# Altium PCB PCB1.PcbDoc
Units mm, origin at the board's own origin, x right, y up, seen from the top; angles counter-clockwise.
Board outline 58.8 x 38.5 mm, 2 copper layers (Top Layer, Bottom Layer); 14 components, 9 nets, 42 pads, 0 vias.
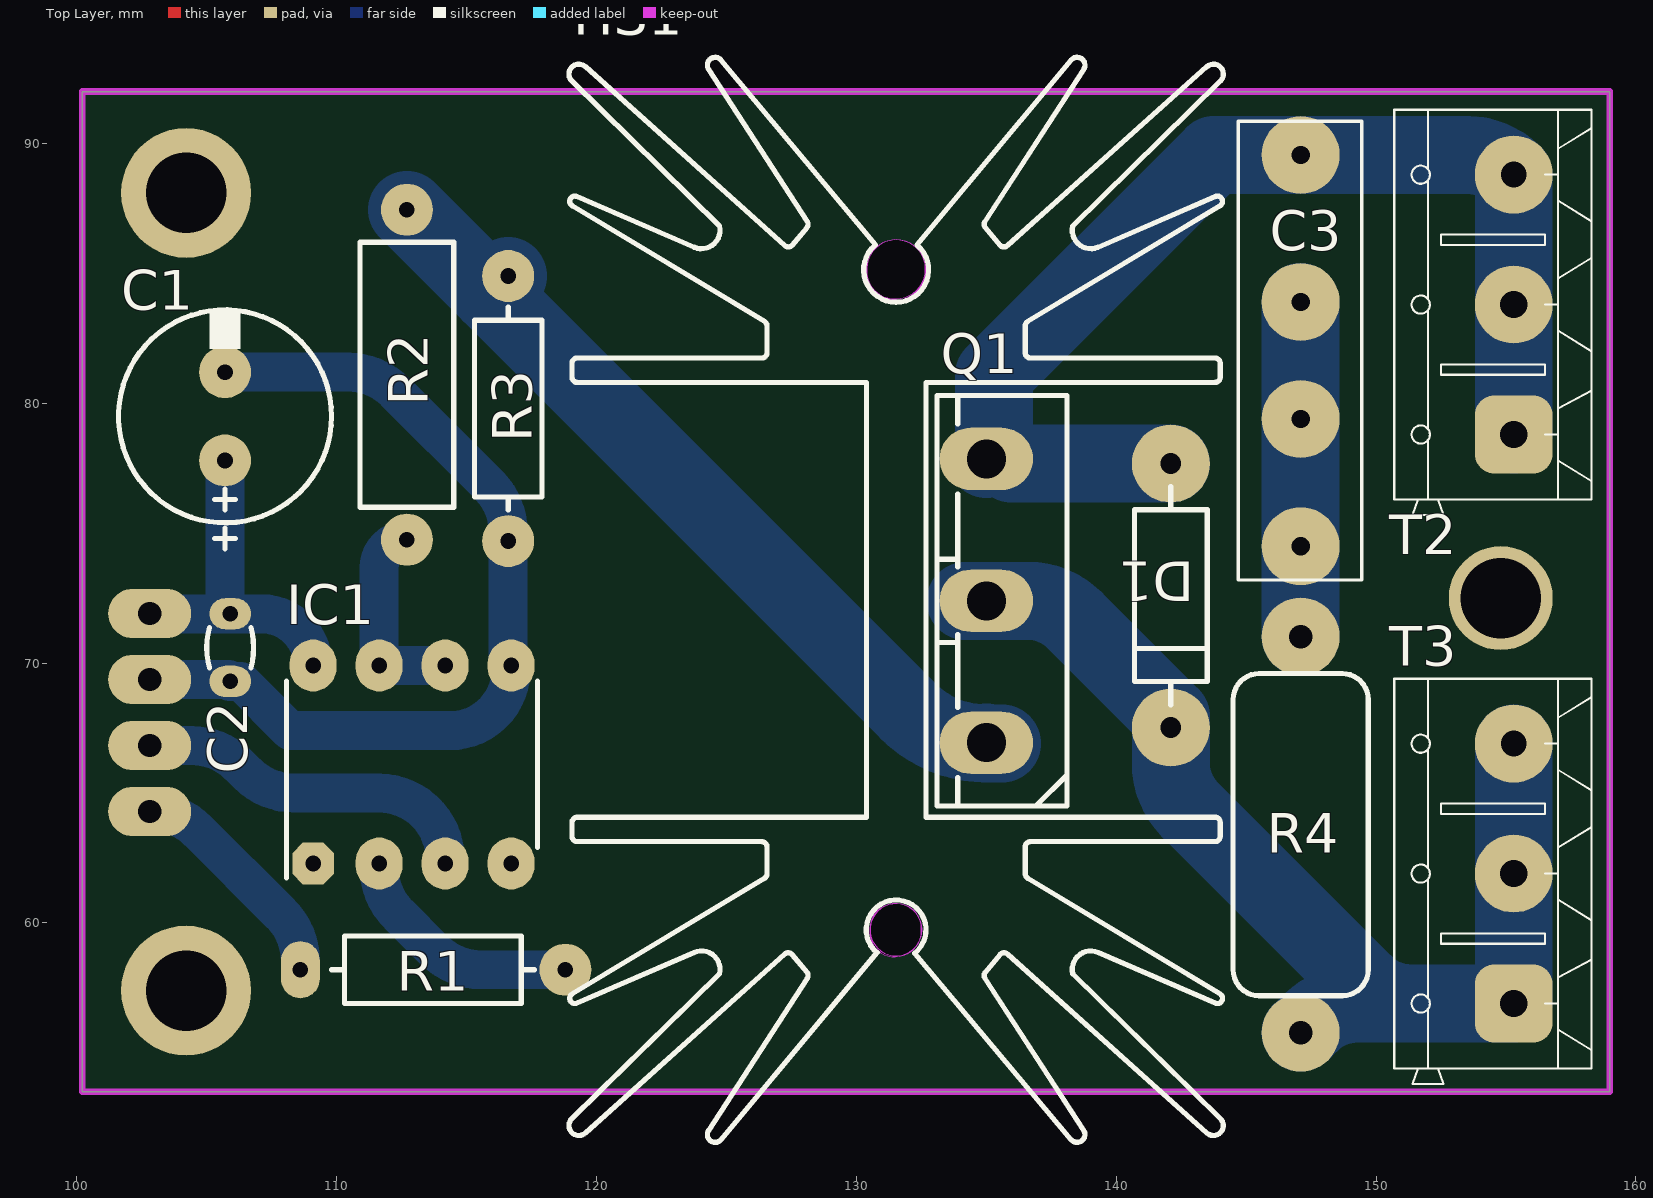
[diagram p0: Top Layer view]
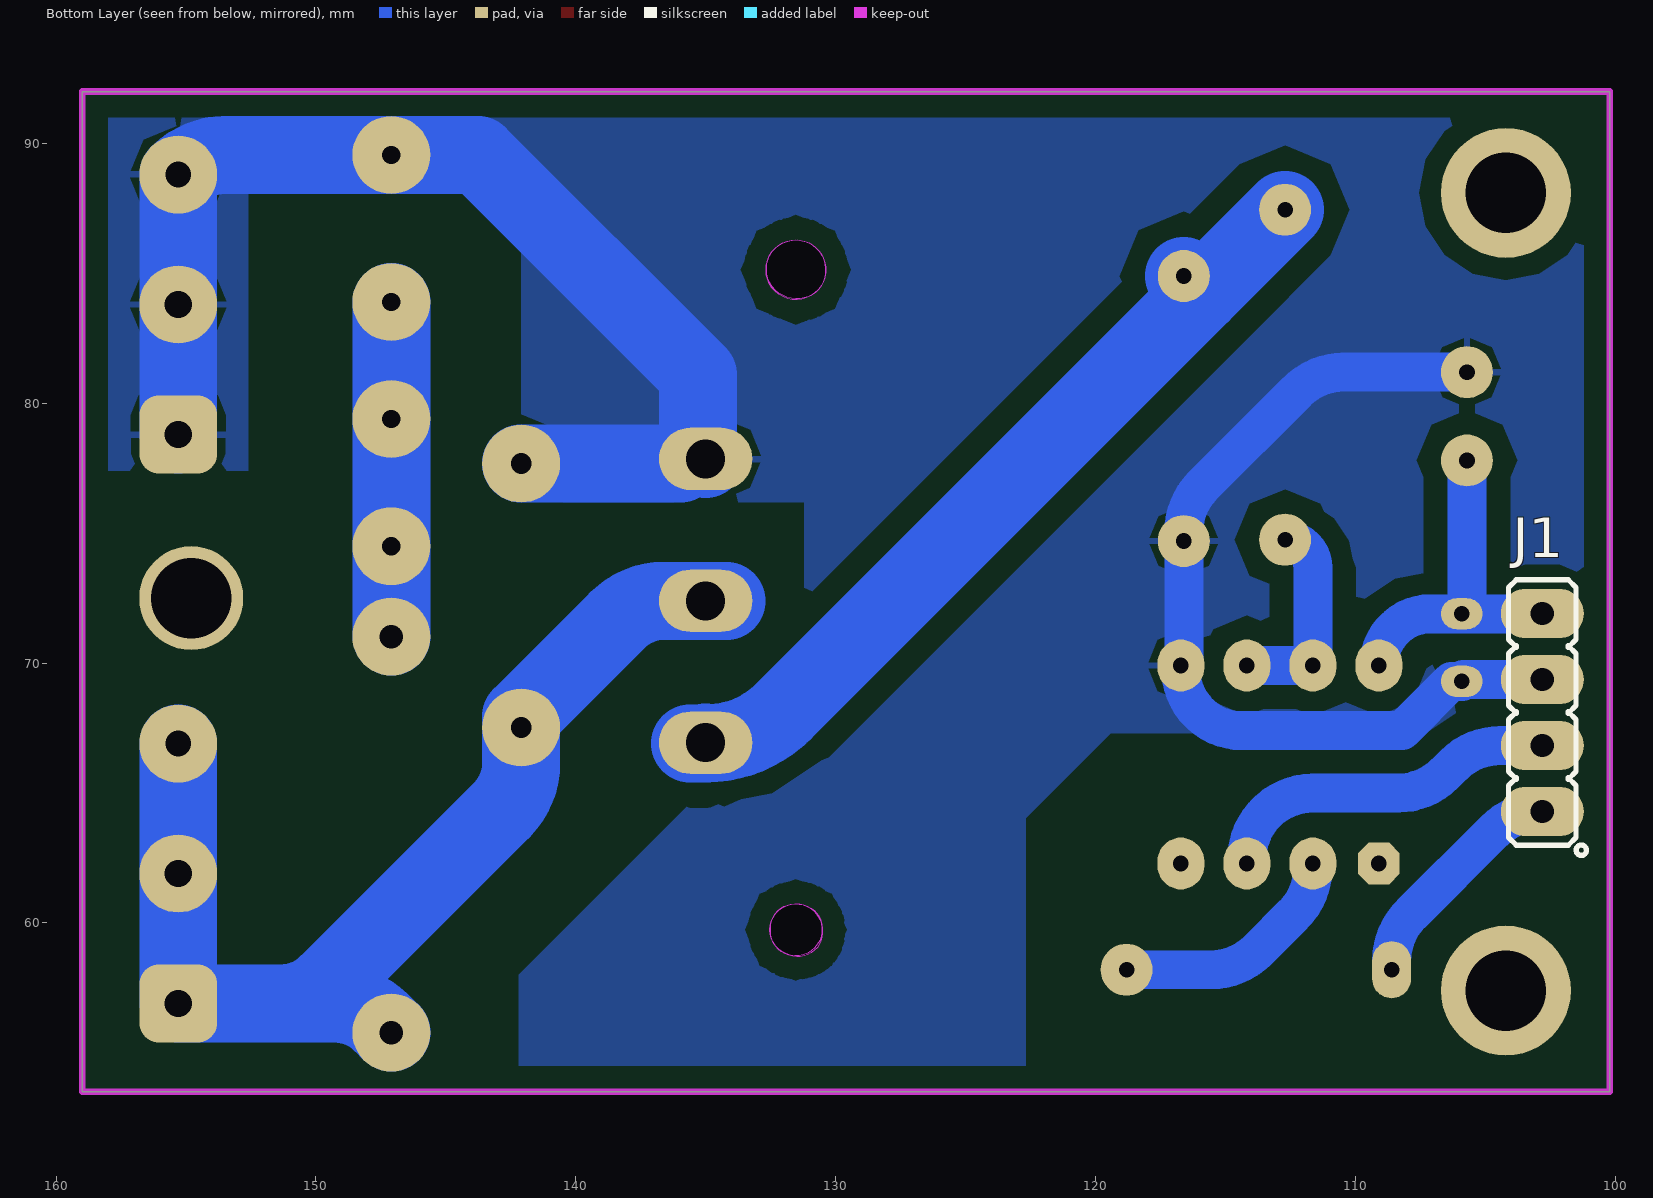
[diagram p1: Bottom Layer view, seen from below]

## Layer stack, top to bottom
Top Solder: solder mask 0.0102, Solder Resist, Dk 3.5
Top Layer: signal copper 0.0356
Dielectric 1: dielectric 0.32, FR-4, Dk 4.8
Bottom Layer: signal copper 0.0356
Bottom Solder: solder mask 0.0102, Solder Resist, Dk 3.5

## Board outline
100.2,53.5 100.2,92 159,92 159,53.5

## Design rules (kind name [scope] priority, off if disabled: settings)
Clearance Clearance_1 [InNamedPolygon('GND')] p1: gap=0.8 ignorepadtopadclearanceinfootprint=FALSE except(0: Arc-Hole Track-Hole SMDPad-Hole THPad-Hole Via-Hole Fill-Hole Poly-Hole Region-Hole Text-Hole)
Clearance [All] p2: gap=0.254 ignorepadtopadclearanceinfootprint=FALSE except(0: Arc-Hole Track-Hole SMDPad-Hole THPad-Hole Via-Hole Fill-Hole Poly-Hole Region-Hole Text-Hole)
Height [All] p1: minheight=0 maxheight=51 prefheight=12.7
PolygonConnect [All] p1: connectstyle=Relief reliefconductorwidth=0.254 reliefentries=4 polygonreliefangle="90 Angle" airgapwidth=0.254
RoutingVias [All] p1: holewidth=0.711 width=1.27 viastyle="Through Hole" minholewidth=0.711 minwidth=1.27 maxholewidth=0.711 maxwidth=1.27
SolderMaskExpansion [All] p1: expansion=0.102 istentingtop=FALSE
Width [All] p1: maxlimit=3 minlimit=0.254 preferedwidth=1.5
29 further rules are at their usual default settings.

## Components (designator, comment, footprint, x,y, rotation, side; value= is the part's Value field where it differs from the comment)
C1 "100uF" C_EL_8X12 105.7,79.5 r90 top
C2 "100nF" C_CER_D3 105.9,70.6 r270 top
C3 "10nF" Cap-10nF-630V 147.1,89.56 r270 top
D1 "1N4007" D_AX04_DO41 142.1,72.6 r270 top
HS1 "Symbol to use Heatsink on pcb" HSINK_TO220A 131.5,72.4 r90 top
IC1 "TLP250" DIP762W50P254L966H445Q8N 112.9,66.1 r90 top
J1 "HDR1X4" HDR_M_1X4 102.8,68.1 r90 bottom value=HDRM4
Q1 "IGBT" TO247_3 135,72.4 r90 top (schematic designator Q?)
R1 "220R" R025W_AX04#1 113.7,58.2 r0 top
R2 "15R" R05W_AX05 112.7,81.1 r90 top
R3 "10K" R025W_AX04#2 116.6,79.8 r90 top
R4 "470R" R1W_AX06 147.1,63.4 r270 top
T2 "KF301_Terminal" "KF301 3PIN" 155.3,83.8 r90 top
T3 "KF301_Terminal" "KF301 3PIN" 155.3,61.9 r90 top

## Footprints (in the part's own frame and the unit in brackets; to place one, negate y for a bottom-side part, rotate by r counter-clockwise, add the part's x,y. Pads: shape width x height; smd on the part's side, far side on the other; paste and mask are expansions set on the pad)
C_CER_D3 [mm] "CAP, CER MULTILAYER, D:3.5mm, pitch: 2.54mm"
  oval 1.2x1.6 hole 0.6: 1(-1.3,0) 2(1.3,0)
  silkscreen extent -0.78,-0.9 0.78,0.9, body extent -1.75,-0.75 1.75,0.75, height 4
C_EL_8X12 [mm] "Cap Elec, D8.0X12.0H pitch: 3.5mm, RB.14/.26, RB.15/.32"
  round 2 hole 0.6: 1(-1.7,0) 2(1.7,0)
  silkscreen extent -5.1,-4.1 4.1,4.1, body extent -4.02,-4.03 4.03,4.03, height 2.98
Cap-10nF-630V [mm] "Bipolar Capacitor-Design:Ali Hafizi"
  round 3 hole 0.7: 1(0,0) 2(10.16,0)
  silkscreen extent -1.29,-2.4 16.36,2.35, body extent -1.29,-2.4 11.46,2.35, height 12.19
D_AX04_DO41 [mm] "DIODE 0.4 INCH SPACING DO-41"
  round 3 hole 0.8: 1(-5.08,0) 2(5.08,0)
  silkscreen extent -4.2,-1.4 4.2,1.4, body extent -5.68,-1.32 5.68,1.4, height 2.85
DIP762W50P254L966H445Q8N [mm]
  oct 1.6x1.6 hole 0.6: 1(-3.81,3.81)
  oval 2x1.8 hole 0.6: 2(-3.81,1.27) 3(-3.81,-1.27) 4(-3.81,-3.81) 5(3.81,-3.81) 6(3.81,-1.27) 7(3.81,1.27) 8(3.81,3.81)
  silkscreen extent -4.36,-4.83 3.2,4.83, body extent -3.94,-4.83 3.94,4.83, height 4.45
HDR_M_1X4 [mm] "Connector; Header; 4 Position"
  oval 1.9x3.2 hole 0.9 mask+0.1: 1(-3.81,0) 2(-1.27,0) 3(1.27,0) 4(3.81,0)
  silkscreen extent -5.5,-1.7 5.11,1.3, body extent -5.08,-1.27 5.08,1.27, height 8.54
HSINK_TO220A [mm] "HEATSINK, TO-220,"
  Keep-Out Layer board cut-out: 13.887,-0.029 13.811,0.397 13.577,0.761 13.222,1.008 12.8,1.1 12.8,1.1 12.6,1.1 12.204,0.99 11.881,0.737 11.679,0.379 11.629,-0.029 11.629,-0.029 11.715,-0.461 11.96,-0.827 12.326,-1.072 12.758,-1.158 12.758,-1.158 12.8,-1.158 13.351,-0.999 13.749,-0.586 13.887,-0.029
  Keep-Out Layer board cut-out: -11.663,-0.029 -11.721,0.35 -11.919,0.677 -12.228,0.904 -12.6,0.995 -12.6,0.995 -12.8,0.995 -13.159,0.905 -13.456,0.684 -13.646,0.366 -13.7,0 -13.7,0 -13.624,-0.383 -13.407,-0.707 -13.083,-0.924 -12.7,-1 -12.7,-1 -12.6,-1 -12.241,-0.929 -11.937,-0.726 -11.734,-0.422 -11.663,-0.063 -11.663,-0.063
  Keep-Out Layer circle w0.013: c-12.663,-0.029 r1
  Keep-Out Layer circle w0.013: c12.737,-0.029 r1.15
  silkscreen extent -20.84,-12.62 20.92,12.56, body extent -20.88,-12.59 20.88,12.59, height 50.8
"KF301 3PIN" [mm] "Designer Abbas Basereh"
  rrect50% 3x3 hole 1.05: 1(-5,0)
  round 3 hole 1.05: 2(0,0)
  round 3 hole 1: 3(5,0)
  silkscreen extent -8.1,-3 7.5,4.6, body extent -8.1,-3 7.5,4.6, height 10
R1W_AX06 [mm] "RESISTOR 1 WATT, AXIAL0.6"
  round 3 hole 0.9: 1(-7.62,0) 2(7.62,0)
  silkscreen extent -6.2,-2.6 6.2,2.6, body extent -7.97,-2.49 7.97,2.51, height 5
R05W_AX05 [mm] "RESISTOR 0.5 WATT, AXIAL0.5"
  round 2 hole 0.6: 1(-6.35,0) 2(6.35,0)
  silkscreen extent -5.1,-1.8 5.1,1.8, body extent -6.62,-1.75 6.62,1.75, height 3.5
R025W_AX04#1 [mm] "RESISTOR 1/4 WATT, AXIAL0.4"
  oval 1.5x2.2 hole 0.6: 1(-5.1,0)
  round 2 hole 0.6: 2(5.1,0)
  silkscreen extent -3.9,-1.3 3.9,1.3, body extent -5.38,-1.28 5.38,1.28, height 2.6
R025W_AX04#2 [mm] "RESISTOR 1/4 WATT, AXIAL0.4"
  round 2 hole 0.6: 1(-5.1,0) 2(5.1,0)
  silkscreen extent -3.9,-1.3 3.9,1.3, body extent -5.38,-1.28 5.38,1.28, height 2.6
TO247_3 [mm] "TO247, TO-247, TO-3P pitch: 5.5mm 16x5mm, TO-218"
  oval 2.4x3.6 hole 1.5: 1(-5.461,0) 2(0,0) 3(5.461,0)
  silkscreen extent -7.9,-3.1 7.9,1.9, body extent -7.8,-3 7.8,1.8, height 23.9

## Part data
C1: library part CAP_THD_EL, "CAP, THD, ELEC,", ASSEMBLY=ASSEMBLY, DESC=DESCRIPTION, DIST#=MOUSER, MANF=MANF, MANF_P#=MANF_PART#, PARAM=25V, PARAM2=20%, PRICE="10= 5$"
C2: library part CAP_THD_CERML, "CAP, THD, CER MULTI LAYER,", ASSEMBLY=ASSEMBLY, DESC="CAP, CER MULTI LAYER,", MANF=MANF, MANF_P#=MANF_PART#, PARAM=50V, PARAM2=PARAM2, PRICE="100= 1$"
C3: library part "CAP CERAMIC TOTAL SIZE", "CAP Ceramic Total", Designer="Ali Hafizi"
D1: library part DIODE_THD_1N4007, "DIODE, GENERAL PURPOSE, 1000V/1A", ASSEMBLY=ASSEMBLY, DESC=DESCRIPTION, MANF=Diodes, MANF_P#=1N4007, PARAM="1000V, 1.15V", PARAM2=1.5A, PRICE=PRICE
HS1: library part Heatsink
IC1: "Integrated Circuit", Manufacturer_Name=Toshiba, RS Part Number=0768100, Datasheet Link=http://toshiba.semicon-storage.com/info/docget.jsp?did=16821&prodName=TLP250, Height=4.45mm, Manufacturer_Part_Number=TLP250, RS Price/Stock=http://uk.rs-online.com/web/p/products/0768100
J1: library part HDR_M_1X4, "CONN, HEADER, Male, pitch: 2.54mm, 4POS"
Q1: Package="TO-247 Fairchild Semiconductor", Availability=Unavailable, MF="ON Semiconductor", MP=FGH40N60SFDTU, PRICE=None, SnapEDA_Link=https://www.snapeda.com/parts/FGH40N60SFDTU/ON%20Semiconductor/view-part/405516/?ref=snap
R1 R2 R3 R4: library part RES_THD, "RESISTOR, THD", ASSEMBLY=ASSEMBLY, DESC=DESCRIPTION, DIST#=MOUSER, MANF="KOA SPEER", MANF_P#=RK73H1ETTP4701F, PARAM=0.063W, PARAM2=1%, PRICE="100= 0.5$"
T2 T3: library part KF301-3Pin_Terminal, "Terminal 3 Pin 250VAC 16A", Designer="Abbas Basereh", Link=https://www.aliexpress.com/item/, Part. No="KF301 3P"

## Free pads (board coordinates)
  round 5 hole 3.1: 1(104.2,88.1) 2(104.2,57.4)
  round 4 hole 3.1: 3(154.8,72.5)
  round 3 hole 0.7: ""(147.1,74.5) ""(147.1,83.9)

## Nets (pads, with @x,y where several pads share a name; then routed paths per layer and width w, separated by ;. In a path a pad name is that pad's centre, name@x,y a point inside that pad or via, vN(x,y) a via of type N, cw(c..) or ccw(c..) an arc to the next point about the centre after c; other vN are vias at no path point)
+20V: C1.1 C2.1 IC1.8 J1.4 | length 13.4
  Bottom Layer w1.5: J1.4 102.8,71.9 C2.1 ; C1.1 105.7,72.383 ccw(c106.383,72.383) C2.1 ; IC1.8 ccw(c107.1,69.91) 107.1,71.9 C2.1
D: D1.2 Q1.2 R4.2 T3.1 T3.2 T3.3 | length 43.5
  Bottom Layer w3: Q1.2@134.2,72.4 Q1.2 136.596,72.4 cw(c136.596,69.86) 138.392,71.656 142.1,67.948 D1.2 142.1,66.152 ccw(c144.64,66.152) 142.844,64.356 149.556,57.644 ccw(c151.352,59.44) 151.352,56.9 ; R4.2 147.476,56.156 cw(c149.272,54.36) 149.272,56.9 151.352,56.9 ; T3.3 T3.2 T3.1 151.352,56.9
GND1: IC1.3 J1.2 | length 13.5
  Bottom Layer w1.5: J1.2 104.418,66.83 cw(c104.418,64.29) 106.214,66.086 106.556,65.744 ccw(c108.352,67.54) 108.352,65 111.63,65 cw(c111.63,62.46) 114.17,62.46 IC1.3
NetC3_2: C3.2 pad. R4.1 | length 12.9
  Bottom Layer w3: R4.1 147.1,74.5 pad.@147.1,83.9
NetIC1_2: IC1.2 R1.2 | length 9.4
  Bottom Layer w1.5: IC1.2 111.63,62.122 ccw(c114.17,62.122) 112.374,60.326 113.756,58.944 ccw(c115.552,60.74) 115.552,58.2 R1.2
NetIC1_6: IC1.6 IC1.7 R2.1 | length 8
  Bottom Layer w1.5: R2.1 ccw(c112.7,73.68) 111.63,73.68 IC1.7 IC1.6
NetQ1_1: Q1.1 R2.2 R3.2 | length 33.4
  Bottom Layer w3: R2.2 R3.2@115.925,84.225 ; R3.2 R3.2@115.925,84.225 ; Q1.1@134.961,66.9 Q1.1@135.6,66.9 ; Q1.1 Q1.1@135.6,66.9 ; R3.2@115.925,84.225 132.002,68.148 ccw(c134.975,71.113) 134.288,66.971 ccw(c134.777,69.931) 134.903,66.933 Q1.1@135.6,66.9
Pulse: J1.1 R1.1 | length 8.9
  Bottom Layer w1.5: J1.1 102.858,64.29 cw(c102.858,61.75) 104.654,63.546 107.856,60.344 cw(c106.06,58.548) 108.6,58.548 R1.1
S: C1.2 C2.2 C3.1 D1.1 IC1.5 J1.3 Q1.3 R3.1 T2.1 T2.2 T2.3 | length 78.4
  Bottom Layer w1.5: J1.3 C2.2@105.83,69.37 ; C1.2 110.448,81.2 cw(c110.448,78.66) 112.244,80.456 115.856,76.844 cw(c114.06,75.048) 116.6,75.048 R3.1 116.6,70.02 IC1.5 ; C2.2 106.3,69.3 108.2,67.4 114.357,67.4 ccw(c114.357,69.753) IC1.5@116.704,69.91
  Bottom Layer w3: Q1.3 135.3,78.161 135.3,81.1 143.76,89.56 153.488,89.56 cw(c153.488,87.02) 155.284,88.816 T2.3 T2.2 T2.1 ; Q1.3@135.976,77.68 D1.1
pads on no net: IC1.1 IC1.4

## Polygon pours and split planes (outlines as drawn)
S on Bottom Layer "GND" (solid, remove dead copper, pour order 2): 158.3,91.3 158.3,54.2 100.9,54.2 100.9,91.3

## Keep-outs
Keep-Out Layer:
  the board outline again, w0.254

## Other copper
Bottom Layer:
  pour cut-out: 107.386,67.3 119.414,67.3 122.686,64.028 122.686,53.528 107.386,53.528
  pour cut-out: 152.7,77.1 152.6,77.2 152.6,88.1 144.2,88.1 142.1,86 142.1,77.1
  pour cut-out: 158.3,77.4 145.7,77.4 145.7,76.2 131.2,76.2 131.2,69 142.2,58 142.2,54.4 158.1,54.4 158.3,54.2